# EAGLE board eRIC_B3 (EAGLE 7.0.0)
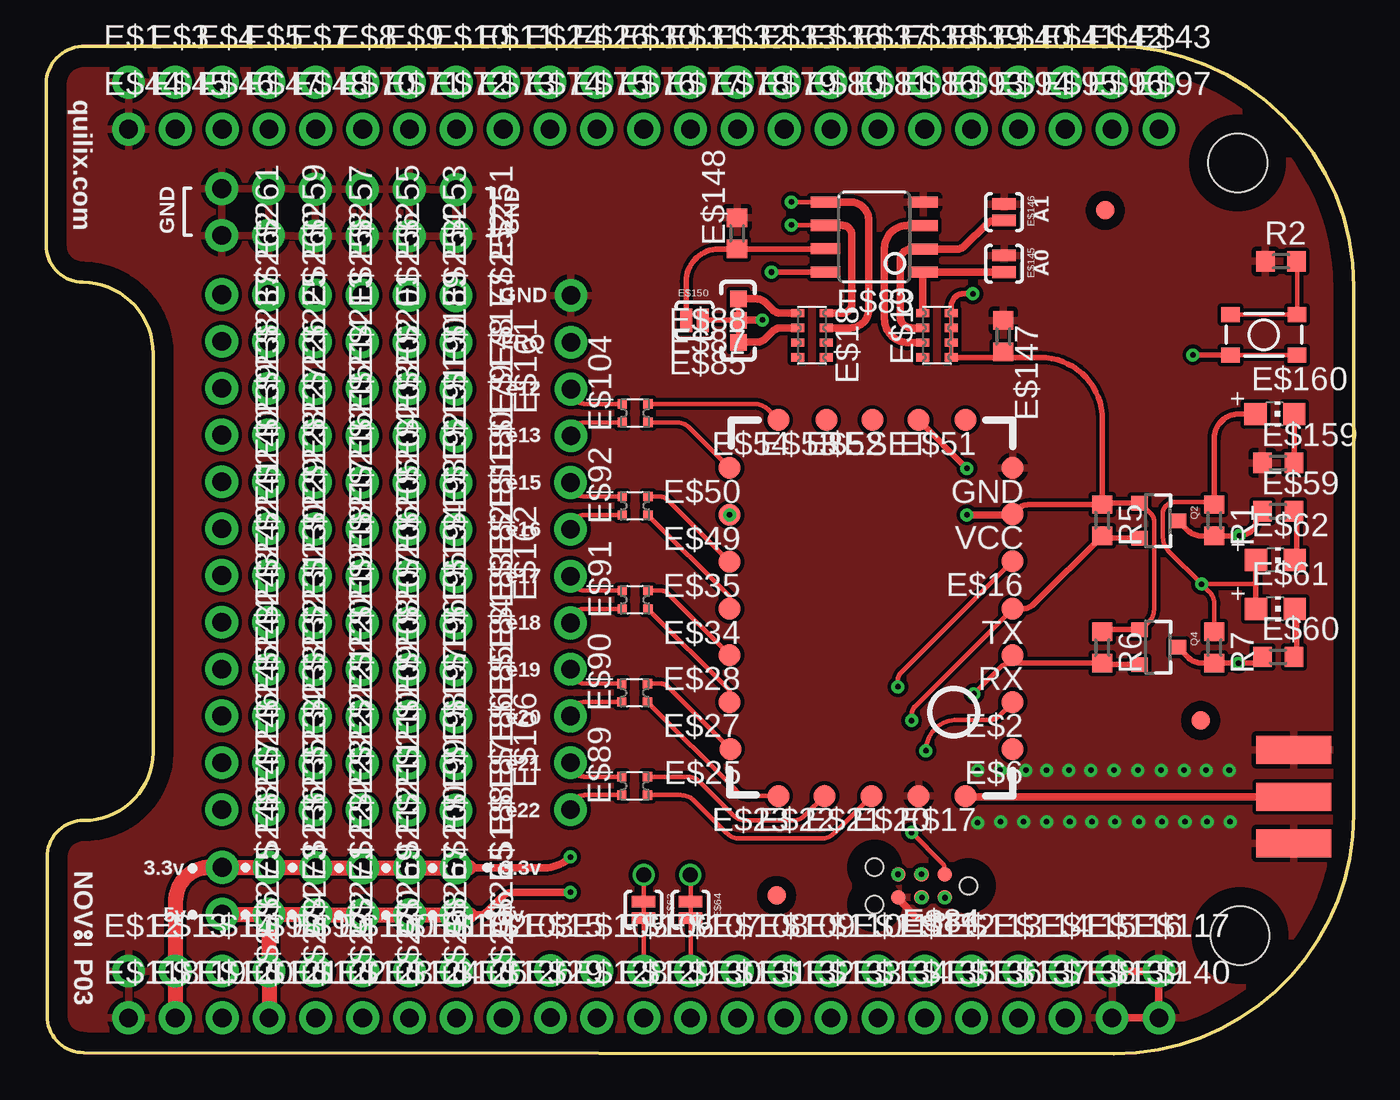
[diagram p0: board, top side]
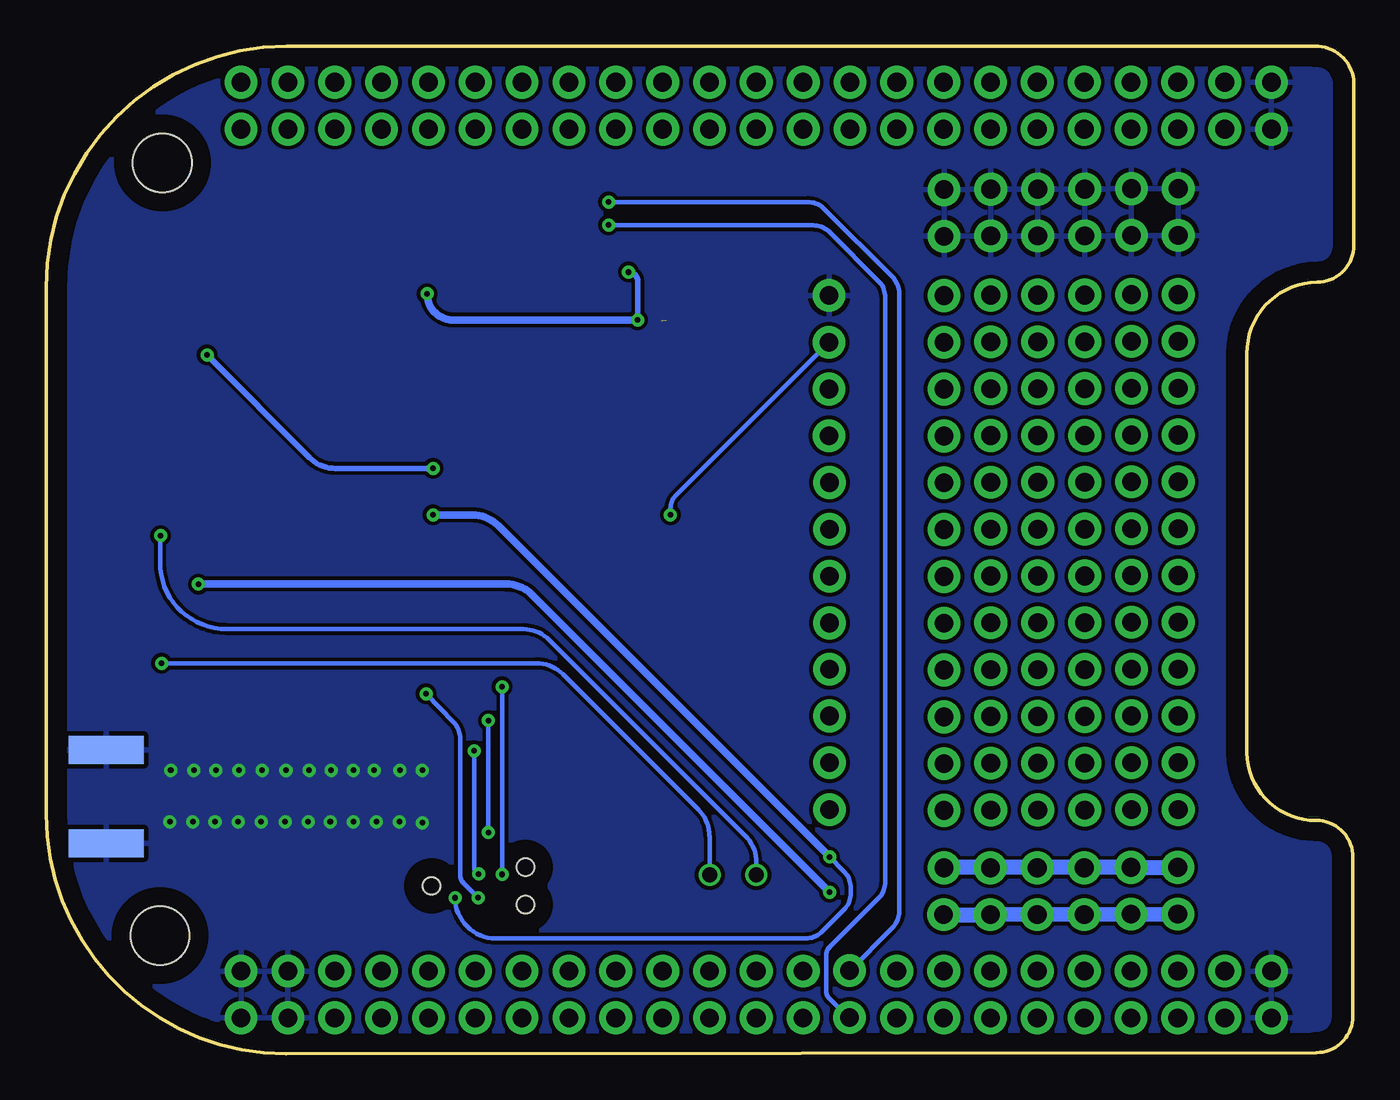
[diagram p1: board, bottom side, seen from below]

Size 70.92 x 54.67 mm. Coordinates in mm from the lower left corner, seen from the top.
Outline: 0,43.86 0,52.66 arc-90 2.12,54.66 57.86,54.67 arc-90 70.92,41.6 70.92,13 arc-90 57.91,0 2.05,0.06 arc-90 0.05,2.06 0.05,10.66 arc-90 2.05,12.66 arc90 5.8,16.34 5.8,37.99 arc90 2,41.86 arc-90 0,43.86
Copper layers (1*16): Top 0.035mm / dielectric 1.5mm / Bottom 0.035mm
Design rules "default *": minimum track width 10mil, minimum drill 24mil, track to track 8mil, track to pad 8mil, pad to pad 8mil, via to via 8mil, smd to smd 8mil, copper to edge 40mil, drill to drill 8mil, minimum pad ring 10mil, minimum via ring 8mil, stop-mask expansion 4mil, vias tented up to drill 0.3mm, thermal gap 10mil
Holes 3.2 mm at 64.75,6.41 64.62,48.34

## Footprints (pad centres in the part's own frame; a part is rotated, then mirrored left to right if it is on the bottom)
1X01-CLEANBIG = drill 1.016 pad 1.778: 1 0,0
TP12R = smd 1.2 x 1.2: TP 0,0
EXBV8V = smd 0.45 x 0.7: 1 -1.2,-0.775; 2 -0.4,-0.775; 3 0.4,-0.775; 4 1.2,-0.775; 5 1.2,0.775; 6 0.4,0.775; 7 -0.4,0.775; 8 -1.2,0.775
SMA-EDGE = smd 1.524 x 4.064: GND@0 0,0; GND@1 5.08,0; SIG 2.54,0 | smd 1.524 x 4.064 bottom: GND@2 0,0; GND@3 5.08,0
TACTILE_SWITCH_SMD-3 = smd 1 x 0.8: 1 -1.8,1.1; 2 1.8,1.1; 3 -1.8,-1.1; 4 1.8,-1.1
FIDUCIAL_1MM = smd 1 x 1: 1 0,0
R0603 = smd 1 x 1.1: 1 -0.85,0; 2 0.85,0
CHIP-LED0805 = smd 1.2 x 1.2: A 0,-1.05; C 0,1.05
SJ_2S-NO = smd 0.635 x 1.27: 1 -0.45,0; 2 0.45,0
8S1 = smd 0.6 x 1.6: 1 -1.905,-2.654; 2 -0.645,-2.654; 3 0.625,-2.654; 4 1.895,-2.654; 5 1.905,2.654; 6 0.635,2.654; 7 -0.635,2.654; 8 -1.905,2.654
TC2030-MCP-NL = smd 0.787 x 0.787: 1 1.27,-0.635; 2 1.27,0.635; 3 2.54,-0.635; 4 2.54,0.635; 5 3.81,-0.635; 6 3.81,0.635 | hole 0.95: 0,0; 5.08,-1.016; 5.08,1.016
TP09SQ = smd 0.9 x 0.9: TP 0,0
EXB34V = smd 0.5 x 0.5: 1 -0.5,-0.7; 2 0.5,-0.7; 3 0.5,0.7; 4 -0.5,0.7
1X04-CLEANBIG = drill 1.016 pad 1.778: 1 -3.81,0; 2 -1.27,0; 3 1.27,0; 4 3.81,0
SOT23-3 = smd 0.8 x 0.9: 1 -0.95,-1; 2 0.95,-1; 3 0,1.1

## Placement (x,y rotation side)
E$1  [1X01-CLEANBIG]  4.47,52.71 0 top
E$2  [TP12R]  52.41,19.09 180 top
E$3  [1X01-CLEANBIG]  7.01,52.71 0 top
E$4  [1X01-CLEANBIG]  9.55,52.71 0 top
E$5  [1X01-CLEANBIG]  12.09,52.71 0 top
E$6  [TP12R]  52.41,16.54 180 top
E$7  [1X01-CLEANBIG]  14.63,52.71 0 top
E$8  [1X01-CLEANBIG]  17.17,52.71 0 top
E$9  [1X01-CLEANBIG]  19.71,52.71 0 top
E$10  [1X01-CLEANBIG]  22.25,52.71 0 top
E$11  [1X01-CLEANBIG]  24.79,52.71 0 top
E$12  [1X01-CLEANBIG]  4.47,4.49 0 top
E$13  [1X01-CLEANBIG]  7.01,4.49 0 top
E$14  [1X01-CLEANBIG]  9.55,4.49 0 top
E$15  [1X01-CLEANBIG]  27.35,4.51 0 top
E$16  [TP12R]  52.41,26.74 180 top
E$17  [TP12R]  49.86,13.99 180 top
E$18  [EXBV8V]  41.54,38.99 270 top
E$19  [EXBV8V]  48.31,38.99 90 top
E$20  [TP12R]  47.31,13.99 180 top
E$21  [TP12R]  44.77,13.99 180 top
E$22  [TP12R]  42.22,13.99 180 top
E$23  [TP12R]  39.72,13.99 180 top
E$24  [1X01-CLEANBIG]  27.33,52.71 0 top
E$25  [TP12R]  37.11,16.54 180 top
E$26  [1X01-CLEANBIG]  29.87,52.71 0 top
E$27  [TP12R]  37.06,19.09 180 top
E$28  [TP12R]  37.06,21.64 180 top
E$29  [1X01-CLEANBIG]  27.35,1.96 0 top
E$30  [1X01-CLEANBIG]  32.41,52.71 0 top
E$31  [1X01-CLEANBIG]  34.95,52.71 0 top
E$32  [1X01-CLEANBIG]  37.49,52.71 0 top
E$33  [1X01-CLEANBIG]  40.03,52.71 0 top
E$34  [TP12R]  37.06,24.14 180 top
E$35  [TP12R]  37.06,26.69 180 top
E$36  [1X01-CLEANBIG]  42.57,52.71 0 top
E$37  [1X01-CLEANBIG]  45.11,52.71 0 top
E$38  [1X01-CLEANBIG]  47.65,52.71 0 top
E$39  [1X01-CLEANBIG]  50.19,52.71 0 top
E$40  [1X01-CLEANBIG]  52.73,52.71 0 top
E$41  [1X01-CLEANBIG]  55.27,52.71 0 top
E$42  [1X01-CLEANBIG]  57.81,52.71 0 top
E$43  [1X01-CLEANBIG]  60.35,52.71 0 top
E$44  [1X01-CLEANBIG]  4.47,50.17 0 top
E$45  [1X01-CLEANBIG]  7.01,50.17 0 top
E$46  [1X01-CLEANBIG]  9.55,50.17 0 top
E$47  [1X01-CLEANBIG]  12.09,50.17 0 top
E$48  [1X01-CLEANBIG]  14.63,50.17 0 top
E$49  [TP12R]  37.06,29.24 180 top
E$50  [TP12R]  37.06,31.79 180 top
E$51  [TP12R]  49.86,34.39 180 top
E$52  [TP12R]  44.81,34.39 180 top
E$53  [TP12R]  42.31,34.39 180 top
E$54  [TP12R]  39.72,34.39 180 top
E$55  [SMA-EDGE]  67.66,16.49 270 top
E$56  [TACTILE_SWITCH_SMD-3]  66.04,39.01 0 top
E$57  [FIDUCIAL_1MM]  62.61,18.09 0 top
E$58  [FIDUCIAL_1MM]  57.44,45.76 0 top
E$59  [R0603]  66.81,29.44 0 top
E$60  [R0603]  66.81,21.54 0 top
E$61  [CHIP-LED0805]  66.66,24.14 270 top
E$62  [CHIP-LED0805]  66.66,26.79 270 top
E$63  [SJ_2S-NO]  32.4,7.81 270 top
E$64  [SJ_2S-NO]  34.95,7.81 270 top
E$69  [FIDUCIAL_1MM]  39.61,8.59 0 top
E$70  [1X01-CLEANBIG]  17.17,50.17 0 top
E$71  [1X01-CLEANBIG]  19.71,50.17 0 top
E$72  [1X01-CLEANBIG]  22.25,50.17 0 top
E$73  [1X01-CLEANBIG]  24.79,50.17 0 top
E$74  [1X01-CLEANBIG]  27.33,50.17 0 top
E$75  [1X01-CLEANBIG]  29.87,50.17 0 top
E$76  [1X01-CLEANBIG]  32.41,50.17 0 top
E$77  [1X01-CLEANBIG]  34.95,50.17 0 top
E$78  [1X01-CLEANBIG]  37.49,50.17 0 top
E$79  [1X01-CLEANBIG]  40.03,50.17 0 top
E$80  [1X01-CLEANBIG]  42.57,50.17 0 top
E$81  [1X01-CLEANBIG]  45.11,50.17 0 top
E$83  [8S1]  44.91,44.31 90 top
E$84  [TC2030-MCP-NL]  50.02,9.11 180 top
E$85  [TP09SQ]  37.54,38.61 180 top
E$86  [1X01-CLEANBIG]  47.65,50.17 0 top
E$87  [TP09SQ]  37.54,39.79 180 top
E$88  [TP09SQ]  37.54,40.96 180 top
E$89  [EXB34V]  31.91,14.54 90 top
E$90  [EXB34V]  31.91,19.59 90 top
E$91  [EXB34V]  31.94,24.64 90 top
E$92  [EXB34V]  31.94,29.74 90 top
E$93  [1X01-CLEANBIG]  50.19,50.17 0 top
E$94  [1X01-CLEANBIG]  52.73,50.17 0 top
E$95  [1X01-CLEANBIG]  55.27,50.17 0 top
E$96  [1X01-CLEANBIG]  57.81,50.17 0 top
E$97  [1X01-CLEANBIG]  60.35,50.17 0 top
E$98  [1X01-CLEANBIG]  12.09,4.49 0 top
E$99  [1X01-CLEANBIG]  14.63,4.49 0 top
E$100  [1X01-CLEANBIG]  17.17,4.49 0 top
E$101  [1X01-CLEANBIG]  19.71,4.49 0 top
E$102  [1X01-CLEANBIG]  22.25,4.49 0 top
E$103  [1X01-CLEANBIG]  24.79,4.49 0 top
E$104  [EXB34V]  31.94,34.76 90 top
E$105  [1X01-CLEANBIG]  29.87,4.49 0 top
E$106  [1X01-CLEANBIG]  32.41,4.49 0 top
E$107  [1X01-CLEANBIG]  34.95,4.49 0 top
E$108  [1X01-CLEANBIG]  37.49,4.49 0 top
E$109  [1X01-CLEANBIG]  40.03,4.49 0 top
E$110  [1X01-CLEANBIG]  42.57,4.49 0 top
E$111  [1X01-CLEANBIG]  45.11,4.49 0 top
E$112  [1X01-CLEANBIG]  47.65,4.49 0 top
E$113  [1X01-CLEANBIG]  50.19,4.49 0 top
E$114  [1X01-CLEANBIG]  52.73,4.49 0 top
E$115  [1X01-CLEANBIG]  55.27,4.49 0 top
E$116  [1X01-CLEANBIG]  57.81,4.49 0 top
E$117  [1X01-CLEANBIG]  60.35,4.49 0 top
E$118  [1X01-CLEANBIG]  4.47,1.95 0 top
E$119  [1X01-CLEANBIG]  7.01,1.95 0 top
E$120  [1X01-CLEANBIG]  9.55,1.95 0 top
E$121  [1X01-CLEANBIG]  12.09,1.95 0 top
E$122  [1X01-CLEANBIG]  14.63,1.95 0 top
E$123  [1X01-CLEANBIG]  17.17,1.95 0 top
E$124  [1X01-CLEANBIG]  19.71,1.95 0 top
E$125  [1X01-CLEANBIG]  22.25,1.95 0 top
E$126  [1X01-CLEANBIG]  24.79,1.95 0 top
E$128  [1X01-CLEANBIG]  29.87,1.95 0 top
E$129  [1X01-CLEANBIG]  32.41,1.95 0 top
E$130  [1X01-CLEANBIG]  34.95,1.95 0 top
E$131  [1X01-CLEANBIG]  37.49,1.95 0 top
E$132  [1X01-CLEANBIG]  40.03,1.95 0 top
E$133  [1X01-CLEANBIG]  42.57,1.95 0 top
E$134  [1X01-CLEANBIG]  45.11,1.95 0 top
E$135  [1X01-CLEANBIG]  47.65,1.95 0 top
E$136  [1X01-CLEANBIG]  50.19,1.95 0 top
E$137  [1X01-CLEANBIG]  52.73,1.95 0 top
E$138  [1X01-CLEANBIG]  55.27,1.95 0 top
E$139  [1X01-CLEANBIG]  57.81,1.95 0 top
E$140  [1X01-CLEANBIG]  60.35,1.95 0 top
E$145  [SJ_2S-NO]  51.95,42.86 270 top
E$146  [SJ_2S-NO]  51.95,45.66 270 top
E$147  [R0603]  51.91,38.94 270 top
E$148  [R0603]  37.47,44.51 90 top
E$150  [SJ_2S-NO]  35.16,39.8 0 top
E$159  [R0603]  66.81,32.06 0 top
E$160  [CHIP-LED0805]  66.64,34.71 270 top
E$161  [1X04-CLEANBIG]  28.46,37.34 90 top
E$162  [1X04-CLEANBIG]  28.44,27.19 90 top
E$166  [1X04-CLEANBIG]  28.44,17.06 90 top
E$177  [1X01-CLEANBIG]  22.22,41.14 270 top
E$178  [1X01-CLEANBIG]  22.22,38.6 270 top
E$179  [1X01-CLEANBIG]  22.22,36.06 270 top
E$180  [1X01-CLEANBIG]  22.22,33.52 270 top
E$181  [1X01-CLEANBIG]  22.22,30.98 270 top
E$182  [1X01-CLEANBIG]  22.22,28.44 270 top
E$183  [1X01-CLEANBIG]  22.22,25.9 270 top
E$184  [1X01-CLEANBIG]  22.22,23.36 270 top
E$185  [1X01-CLEANBIG]  22.22,20.82 270 top
E$186  [1X01-CLEANBIG]  22.22,18.28 270 top
E$187  [1X01-CLEANBIG]  22.22,15.74 270 top
E$188  [1X01-CLEANBIG]  22.22,13.2 270 top
E$189  [1X01-CLEANBIG]  19.69,41.17 270 top
E$190  [1X01-CLEANBIG]  19.69,38.63 270 top
E$191  [1X01-CLEANBIG]  19.69,36.09 270 top
E$192  [1X01-CLEANBIG]  19.69,33.55 270 top
E$193  [1X01-CLEANBIG]  19.69,31.01 270 top
E$194  [1X01-CLEANBIG]  19.69,28.47 270 top
E$195  [1X01-CLEANBIG]  19.69,25.93 270 top
E$196  [1X01-CLEANBIG]  19.69,23.39 270 top
E$197  [1X01-CLEANBIG]  19.69,20.85 270 top
E$198  [1X01-CLEANBIG]  19.69,18.31 270 top
E$199  [1X01-CLEANBIG]  19.69,15.77 270 top
E$200  [1X01-CLEANBIG]  19.69,13.23 270 top
E$201  [1X01-CLEANBIG]  17.15,41.17 270 top
E$202  [1X01-CLEANBIG]  17.15,38.63 270 top
E$203  [1X01-CLEANBIG]  17.15,36.09 270 top
E$204  [1X01-CLEANBIG]  17.15,33.55 270 top
E$205  [1X01-CLEANBIG]  17.15,31.01 270 top
E$206  [1X01-CLEANBIG]  17.15,28.47 270 top
E$207  [1X01-CLEANBIG]  17.15,25.93 270 top
E$208  [1X01-CLEANBIG]  17.15,23.39 270 top
E$209  [1X01-CLEANBIG]  17.15,20.85 270 top
E$210  [1X01-CLEANBIG]  17.15,18.31 270 top
E$211  [1X01-CLEANBIG]  17.15,15.77 270 top
E$212  [1X01-CLEANBIG]  17.15,13.23 270 top
E$213  [1X01-CLEANBIG]  14.6,41.17 270 top
E$214  [1X01-CLEANBIG]  14.6,38.63 270 top
E$215  [1X01-CLEANBIG]  14.6,36.09 270 top
E$216  [1X01-CLEANBIG]  14.6,33.55 270 top
E$217  [1X01-CLEANBIG]  14.6,31.01 270 top
E$218  [1X01-CLEANBIG]  14.6,28.47 270 top
E$219  [1X01-CLEANBIG]  14.6,25.93 270 top
E$220  [1X01-CLEANBIG]  14.6,23.39 270 top
E$221  [1X01-CLEANBIG]  14.6,20.85 270 top
E$222  [1X01-CLEANBIG]  14.6,18.31 270 top
E$223  [1X01-CLEANBIG]  14.6,15.77 270 top
E$224  [1X01-CLEANBIG]  14.6,13.23 270 top
E$225  [1X01-CLEANBIG]  12.06,41.19 270 top
E$226  [1X01-CLEANBIG]  12.06,38.65 270 top
E$227  [1X01-CLEANBIG]  12.06,36.11 270 top
E$228  [1X01-CLEANBIG]  12.06,33.57 270 top
E$229  [1X01-CLEANBIG]  12.06,31.03 270 top
E$230  [1X01-CLEANBIG]  12.06,28.49 270 top
E$231  [1X01-CLEANBIG]  12.06,25.95 270 top
E$232  [1X01-CLEANBIG]  12.06,23.41 270 top
E$233  [1X01-CLEANBIG]  12.06,20.87 270 top
E$234  [1X01-CLEANBIG]  12.06,18.33 270 top
E$235  [1X01-CLEANBIG]  12.06,15.79 270 top
E$236  [1X01-CLEANBIG]  12.06,13.25 270 top
E$237  [1X01-CLEANBIG]  9.52,41.19 270 top
E$238  [1X01-CLEANBIG]  9.52,38.65 270 top
E$239  [1X01-CLEANBIG]  9.52,36.11 270 top
E$240  [1X01-CLEANBIG]  9.52,33.57 270 top
E$241  [1X01-CLEANBIG]  9.52,31.03 270 top
E$242  [1X01-CLEANBIG]  9.52,28.49 270 top
E$243  [1X01-CLEANBIG]  9.52,25.95 270 top
E$244  [1X01-CLEANBIG]  9.52,23.41 270 top
E$245  [1X01-CLEANBIG]  9.52,20.87 270 top
E$246  [1X01-CLEANBIG]  9.52,18.33 270 top
E$247  [1X01-CLEANBIG]  9.52,15.79 270 top
E$248  [1X01-CLEANBIG]  9.52,13.25 270 top
E$251  [1X01-CLEANBIG]  22.22,46.89 270 top
E$252  [1X01-CLEANBIG]  22.22,44.35 270 top
E$253  [1X01-CLEANBIG]  19.69,46.92 270 top
E$254  [1X01-CLEANBIG]  19.69,44.38 270 top
E$255  [1X01-CLEANBIG]  17.15,46.92 270 top
E$256  [1X01-CLEANBIG]  17.15,44.38 270 top
E$257  [1X01-CLEANBIG]  14.6,46.92 270 top
E$258  [1X01-CLEANBIG]  14.6,44.38 270 top
E$259  [1X01-CLEANBIG]  12.06,46.94 270 top
E$260  [1X01-CLEANBIG]  12.06,44.4 270 top
E$261  [1X01-CLEANBIG]  9.52,46.94 270 top
E$262  [1X01-CLEANBIG]  9.52,44.4 270 top
E$265  [1X01-CLEANBIG]  22.22,10.09 270 top
E$266  [1X01-CLEANBIG]  22.25,7.55 270 top
E$267  [1X01-CLEANBIG]  19.71,10.09 270 top
E$268  [1X01-CLEANBIG]  19.71,7.55 270 top
E$269  [1X01-CLEANBIG]  17.18,10.09 270 top
E$270  [1X01-CLEANBIG]  17.18,7.55 270 top
E$271  [1X01-CLEANBIG]  14.62,10.09 270 top
E$272  [1X01-CLEANBIG]  14.62,7.55 270 top
E$273  [1X01-CLEANBIG]  12.09,10.12 270 top
E$274  [1X01-CLEANBIG]  12.09,7.58 270 top
E$275  [1X01-CLEANBIG]  9.55,10.12 270 top
E$276  [1X01-CLEANBIG]  9.55,7.58 270 top
GND  [TP12R]  52.41,31.79 180 top
Q2  BSS138  [SOT23-3]  60.29,28.92 270 top
Q4  BSS138  [SOT23-3]  60.29,22.06 270 top
R1  10K  [R0603]  63.36,28.95 270 top
R2  10K  [R0603]  66.97,43 0 top
R5  10K  [R0603]  57.28,28.95 270 top
R6  10K  [R0603]  57.28,22.04 270 top
R7  10K  [R0603]  63.36,22.04 270 top
RESET  [TP12R]  47.31,34.39 180 top
RX  [TP12R]  52.41,21.64 180 top
TX  [TP12R]  52.41,24.14 180 top
VCC  [TP12R]  52.41,29.29 180 top

## Library data of the parts
E$1 E$3-E$5 E$7-E$15 E$24 E$26 E$29-E$33 E$36-E$48 E$57-E$62 E$69-E$81 E$86 E$93-E$103 E$105-E$126 E$128-E$140 E$159-E$162 E$166 E$177-E$248 E$251-E$262 E$265-E$276 R1 R2 R5-R7 = adafruit
E$2 E$6 E$16 E$17 E$20-E$23 E$25 E$27 E$28 E$34 E$35 E$49-E$54 E$85 E$87 E$88 GND RESET RX TX VCC = testpad
E$18 E$19 E$89-E$92 E$104 = resistor-dil
E$55 = SparkFun-Connectors
E$56 = SparkFun-Electromechanical
E$63 E$64 E$145 E$146 E$150 = SparkFun-Capacitors
E$83 = atmel
E$84 = tag
E$147 E$148 = eagle-ltspice
Q2 Q4 = SparkFun

## Nets
ANT: E$17.TP E$55.SIG
GND: E$1.1 E$12.1 E$20.TP E$44.1 E$55.GND@0 E$55.GND@1 E$55.GND@2 E$55.GND@3 E$83.4 E$84.6 E$116.1 E$117.1 E$118.1 E$139.1 E$140.1 E$145.1 E$146.1 E$147.1 E$148.2 E$159.1 E$161.4 E$251.1 E$252.1 E$253.1 E$254.1 E$255.1 E$256.1 E$257.1 E$258.1 E$259.1 E$260.1 E$261.1 E$262.1 GND.TP R2.1
HV: E$61.A E$62.A E$98.1 E$121.1 E$160.A E$266.1 E$268.1 E$270.1 E$272.1 E$274.1 E$276.1 R1.1 R7.1
LV: E$13.1 E$18.1 E$18.2 E$19.1 E$19.2 E$19.3 E$19.4 E$83.8 E$84.2 E$85.TP E$87.TP E$88.TP E$119.1 E$147.2 E$150.2 E$265.1 E$267.1 E$269.1 E$271.1 E$273.1 E$275.1 Q2.1 Q4.1 R5.1 R6.1 VCC.TP
S$6: E$51.TP
S$7: E$18.8 E$29.1 E$83.6
S$8: E$49.TP E$161.3
S$11: E$34.TP E$92.1
S$14: E$56.3 E$56.4 RESET.TP
S$16: E$19.5 E$83.1 E$145.2
S$17: E$60.2 E$61.C
S$19: E$19.6 E$83.2 E$146.2
S$21: E$56.1 E$56.2 R2.2
S$22: E$93.1
S$23: E$19.7 E$83.3
S$25: E$15.1 E$18.7 E$83.5
S$28: E$2.TP E$84.3
S$30: E$83.7 E$148.1 E$150.1
S$38: E$159.2 E$160.C
S$39: E$84.4 Q4.2 R6.2 RX.TP
S$40: E$59.1 E$63.1 E$63.2 E$106.1 Q2.3 R1.2
S$43: E$59.2 E$62.C
S$44: E$16.TP E$84.5
S$45: E$89.3 E$166.2
S$46: E$90.4 E$166.3
S$47: E$90.3 E$166.4
S$48: E$84.1 Q2.2 R5.2 TX.TP
S$49: E$89.4 E$166.1
S$50: E$60.1 E$64.1 E$64.2 E$107.1 Q4.3 R7.2
S$51: E$91.4 E$162.1
S$52: E$91.3 E$162.2
S$53: E$92.4 E$162.3
S$54: E$92.3 E$162.4
S$55: E$21.TP E$89.1
S$56: E$22.TP E$89.2
S$57: E$23.TP E$90.1
S$58: E$25.TP E$90.2
S$59: E$27.TP E$91.1
S$60: E$28.TP E$91.2
S$61: E$35.TP E$92.2
S$62: E$50.TP E$104.1
S$63: E$54.TP E$104.2
S$64: E$104.3 E$161.2
S$65: E$104.4 E$161.1

## Tracks (layer width: path | path; a pad name or v marks a point on that pad's centre or on a via)
ANT
  Top 0.406: E$17.TP arc45 49.96,13.95 E$55.SIG
GND  (via drill 0.3)
  Top 0.406: E$139.1 E$140.1 E$117.1 E$116.1 | E$84.6 46.2,8.4 47.22,7.39
  other vias: 59.21,15.39 60.46,15.39 61.71,15.39 62.91,15.39 64.16,15.39 59.27,12.59 60.52,12.59 61.77,12.59 62.96,12.59 64.21,12.59 51.77,12.59 54.27,15.39 55.46,15.39 56.66,15.39 57.91,15.39 53.02,12.59 54.27,12.59 55.52,12.59 56.71,12.59 57.96,12.59 50.52,12.54 51.74,15.39 50.52,15.39 53.14,15.39
  pour Top: -0.98,55.09 71.9,55.16 72.7,0.25 arc-90 72.31,-0.24 -0.53,-0.26
  pour Bottom: -0.98,55.41 71.97,55.49 72.45,-0.09 -0.5,-0.16
HV  (via drill 0.3)
  Top 0.254: 63.02,29.84 R1.1 | 62.92,29.94 61.24,29.94 arc45 60.81,29.78 arc45 60.56,29.42 60.56,28.1 arc45 60.86,27.29 v62.66,25.49 | v62.66,25.49 65.61,25.49 | R7.1 63.36,24.38 arc45 63.06,25.09 v62.66,25.49
  Top 0.305: 63.02,29.84 62.92,29.94 | E$62.A 65.61,25.49 E$61.A | R1.1 63.36,33.4 arc-90 64.66,34.71 E$160.A
  Top 0.406: R1.1 | 23.01,7.53 23.49,7.53 arc45 23.89,7.71 24.65,8.47 arc-45 25.35,8.76 v28.44,8.76 | 14.6,7.58 arc-90 E$272.1
  Top 0.813: E$272.1 E$270.1 E$268.1 E$266.1 22.25,7.53 23.01,7.53 | E$276.1 E$274.1 | E$274.1 14.6,7.58 | E$274.1 E$98.1 E$121.1
  Bottom 0.406: v62.66,25.49 45.97,25.49 arc45 44.55,24.9 28.41,8.76 v28.44,8.76
  Bottom 0.813: E$276.1 19.91,7.54 E$266.1
LV  (via drill 0.3)  (1 unrouted)
  Top 0.254: 59.5,29.8 59.32,29.9 59.87,29.35 arc-45 60.09,28.89 60.09,24.1 arc-45 59.77,23.39 59.39,23.01 | VCC.TP 52.41,29.24 | E$19.4 E$19.3 E$19.2 E$19.1 | E$87.TP 37.62,39.79 arc45 37.68,39.81 | 41.4,42.41 E$83.8 arc-45 E$83.8 | E$88.TP E$87.TP | E$87.TP E$85.TP | E$84.2 v48.74,8.46
  Top 0.305: R5.1 57.35,29.87 Q2.1 | R6.1 57.3,23.01 Q4.1 59.39,23.01 | VCC.TP 52.64,29.51 arc-45 53.35,29.8 R5.1 | 37.28,39.8 E$150.2 | E$19.1 51.72,37.79 53.91,37.79 arc-90 57.29,34.41 57.29,29.82 arc-90 R5.1 | 51.88,37.97 E$147.2 | E$19.4 49.09,40.59 arc-90 49.74,41.24 v50.27,41.24 | 41.4,42.41 v39.34,42.41
  Top 0.406: 59.32,29.9 Q2.1 | 59.17,22.89 Q4.1 | E$275.1 8.87,10.12 | 7.01,8.26 arc90 7.01,8.26 | 14.6,10.12 arc-90 E$271.1 | 52.41,29.24 v49.94,29.24 | 37.68,39.81 v38.84,39.81 | 51.72,37.79 arc90 51.88,37.97 | E$18.1 39.85,40.19 arc-45 39.4,40.37 39,40.77 arc45 38.55,40.96 E$88.TP | E$18.2 39.85,39.39 arc45 39.4,39.2 39,38.8 arc-45 38.55,38.61 E$85.TP | 22.96,10.09 27.02,10.09 arc45 v28.43,10.68
  Top 0.813: 8.87,10.12 arc90 7.01,8.26 | 7.01,8.26 E$13.1 E$119.1 | E$275.1 E$273.1 14.6,10.12 | E$271.1 E$269.1 E$267.1 E$265.1 22.96,10.09
  Bottom 0.254: v48.74,8.46 arc-90 46.53,6.26 29.74,6.26 arc-45 28.84,6.63 27.66,7.81 arc-45 27.29,8.71 27.29,9.01 arc-45 27.66,9.91 v28.43,10.68
  Bottom 0.305: v39.34,42.41 arc90 38.84,41.91 v38.84,39.81
  Bottom 0.406: v38.84,39.81 48.84,39.81 arc90 v50.27,41.24 | v28.43,10.68 46.4,28.65 arc-45 47.82,29.24 v49.94,29.24
  Bottom 0.813: 9.49,10.11 arc-45 9.5,10.12 E$273.1 22.24,10.12
S$7  (via drill 0.3)
  Top 0.254: E$83.6 42.24,44.96 v40.41,44.96
  Top 0.406: E$83.6 43.19,44.95 arc-90 43.69,44.45 43.69,40.69 arc-90 43.19,40.19 E$18.8
  Bottom 0.254: v40.41,44.96 29.32,44.95 arc45 28.43,44.57 25.79,41.93 arc45 25.41,41.03 25.41,9.34 arc45 25.79,8.44 28.43,5.8 arc-45 28.61,5.35 28.61,3.42 arc-45 28.43,2.97 27.41,1.96 E$29.1
S$8  (via drill 0.3)
  Top 0.254: E$49.TP arc45 37.06,29.24 E$49.TP
  Bottom 0.254: E$49.TP 37.06,29.59 arc45 36.77,30.3 E$161.3
  other vias: 37.06,29.24
S$11
  Top 0.254: E$92.1 37.06,24.81 E$34.TP
S$14  (via drill 0.3)
  Top 0.254: E$56.4 E$56.3
  Top 0.305: RESET.TP v49.94,31.76 | v62.19,37.91 E$56.3
  Bottom 0.305: v49.94,31.76 55.23,31.76 arc45 56.65,32.35 v62.19,37.91
S$16
  Top 0.406: E$145.2 48.4,42.41 48,42.41 E$83.1 47.54,42.41 E$19.5
S$17
  Top 0.305: E$61.C arc-90 67.81,24.39 67.81,21.69 E$60.2
S$19
  Top 0.254: E$83.2 47.59,43.67 arc45 47.61,43.68
  Top 0.406: E$146.2 51.45,45.21 arc45 51,45.02 49.83,43.85 arc-45 49.38,43.66 48.42,43.66 47.78,43.68 47.61,43.68 46.95,43.68 arc90 46.31,43.04 46.31,40.02 arc90 46.95,39.39 E$19.6
S$21
  Top 0.254: R2.2 67.84,42.98 E$56.2 E$56.1
S$22
  Top 0.254: E$93.1 arc45 50.2,50.15
S$23
  Top 0.254: E$83.3 arc45 47.59,44.94 47.59,44.95
  Top 0.406: 47.88,44.95 47.59,44.95 46.76,44.95 arc90 45.47,43.7 45.47,39.88 arc90 46.76,38.59 E$19.7
S$25  (via drill 0.3)
  Top 0.254: E$83.5 v40.41,46.21
  Top 0.406: E$18.7 43.61,39.39 arc90 44.61,40.38 44.61,45.22 arc90 43.61,46.22 E$83.5
  Bottom 0.254: v40.41,46.21 29.62,46.21 arc45 28.72,45.84 25.04,42.16 arc45 24.66,41.26 24.66,7.72 arc45 25.04,6.82 E$15.1
S$28  (via drill 0.3)
  Top 0.254: v47.47,9.76 E$84.3 | E$2.TP 51.65,18.3 arc-46 51.19,18.11 49.41,18.12 arc90 v47.72,16.44
  Bottom 0.254: v47.47,9.76 47.72,9.99 v47.72,16.44
S$30
  Top 0.254: 41.39,43.66 42.22,43.66 arc45 E$83.7
  Top 0.305: 41.39,43.66 E$148.1 36.47,43.66 arc90 34.72,41.91 E$150.1
S$38
  Top 0.254: 67.69,32.09 arc-90 E$159.2
  Top 0.305: E$160.C 67.69,32.09
S$39  (via drill 0.3)
  Top 0.254: 52.57,21.48 arc45 52.56,21.48 52.56,21.19 | E$84.4 v47.49,8.47 | v50.31,19.54 51.75,20.97 arc-45 52.2,21.16 52.52,21.16 RX.TP
  Top 0.305: Q4.2 57.35,21.11 R6.2 52.56,21.19 | RX.TP 52.57,21.48
  Top 0.406: 59.21,21.19 Q4.2
  Bottom 0.254: v47.49,8.47 48.28,9.25 arc45 48.46,9.7 48.46,17.1 arc-44 48.82,17.98 v50.31,19.54
S$40  (via drill 0.3, 0.8)
  Top 0.254: E$59.1 65.64,29.76 | v64.71,28.11 v64.71,28.1 | v32.41,9.71 arc45 32.4,9.67 E$63.1 E$63.2 arc-45 32.41,7.34 E$106.1
  Top 0.305: Q2.3 61.92,28.39 arc45 62.63,28.1 R1.2 v64.71,28.1 arc90 65.64,29.04 65.64,29.11 arc-90 E$59.1
  Bottom 0.254: v64.71,28.11 arc-4 64.73,28 64.73,26.33 arc-85 61.13,23.04 45.04,23.04 arc45 43.63,22.45 33,11.82 arc45 32.41,10.4 arc-45 32.41,10.39 v32.41,9.71
S$43
  Top 0.305: E$62.C arc90 67.81,26.69 67.81,29.29 E$59.2
S$44  (via drill 0.3)
  Top 0.254: E$16.TP 46.38,20.7 arc45 46.19,20.25 v46.19,19.91 | v46.19,9.74 arc90 E$84.5
  Bottom 0.254: v46.19,19.91 v46.19,9.74
S$45
  Top 0.254: E$89.3 29.19,15.04 arc-90 E$166.2
S$46
  Top 0.254: E$90.4 29.19,19.09 arc90 E$166.3
S$47
  Top 0.254: E$90.3 29.22,20.09 arc-90 E$166.4
S$48  (via drill 0.3)
  Top 0.254: v46.94,12.01 48.63,10.32 arc-40 48.71,10.16 E$84.1 | v46.94,18.09 46.94,18.4 arc-45 47.13,18.85 TX.TP
  Top 0.305: Q2.2 57.3,27.97 R5.2 53.6,24.43 arc-45 52.9,24.14 TX.TP
  Top 0.406: 59.16,28.1 Q2.2
  Bottom 0.254: v46.94,18.09 v46.94,12.01
S$49
  Top 0.254: E$89.4 29.22,14.04 arc90 E$166.1
S$50  (via drill 0.3, 0.8)
  Top 0.254: v34.94,9.71 arc-45 34.95,9.69 E$64.1 E$64.2 E$107.1
  Top 0.305: Q4.3 61.97,21.48 arc45 62.68,21.19 R7.2 v64.66,21.19 | 65.62,21.19 v64.66,21.19 | v64.66,21.19
  Top 0.406: E$60.1 65.62,21.19
  Bottom 0.254: v64.66,21.19 44.32,21.19 arc45 42.9,20.6 35.54,13.23 arc45 34.95,11.82 arc45 34.94,11.79 v34.94,9.71
S$51
  Top 0.254: E$91.4 29.2,24.14 arc90 E$162.1
S$52
  Top 0.254: E$91.3 29.22,25.14 arc-90 E$162.2
S$53
  Top 0.254: E$92.4 29.22,29.24 arc90 E$162.3
S$54
  Top 0.254: E$92.3 29.2,30.24 arc-90 E$162.4
S$55
  Top 0.254: E$89.1 34.43,14.04 arc-45 35.13,13.74 36.9,11.98 arc45 37.6,11.69 42.05,11.69 arc45 42.76,11.98 E$21.TP
S$56
  Top 0.254: E$22.TP 41.18,12.95 arc-45 40.48,12.66 37.95,12.66 arc-45 37.25,12.95 35.46,14.74 arc45 34.75,15.04 E$89.2
S$57
  Top 0.254: E$23.TP 38.13,13.99 arc-45 37.42,14.28 E$90.1
S$58
  Top 0.254: E$25.TP 33.75,19.9 arc45 33.3,20.09 E$90.2
S$59
  Top 0.254: E$91.1 37.06,19.71 E$27.TP
S$60
  Top 0.254: E$28.TP 33.75,24.95 arc45 33.3,25.14 E$91.2
S$61
  Top 0.254: E$35.TP 33.7,30.05 arc45 33.25,30.24 E$92.2
S$62
  Top 0.254: E$50.TP 34.88,33.97 arc45 34.18,34.26 E$104.1
S$63
  Top 0.254: E$54.TP 39.13,34.97 arc45 38.43,35.26 E$104.2
S$64
  Top 0.254: E$104.3 29.27,35.26 arc-90 E$161.2
S$65
  Top 0.254: E$104.4 29.2,34.26 arc90 E$161.1

## Text on the board
_tsilk: quilix.com | GND | GND | A1 | A0 | GND | FRQ | e12 | e13 | e15 | e16 | e17 | e18 | e19 | e20 | e21 | e22 | 3.3v | 3.3v | NOV | 5v | 5v | ePRG | P03